# EAGLE board Finalized Dashboard (EAGLE 7.6.0)
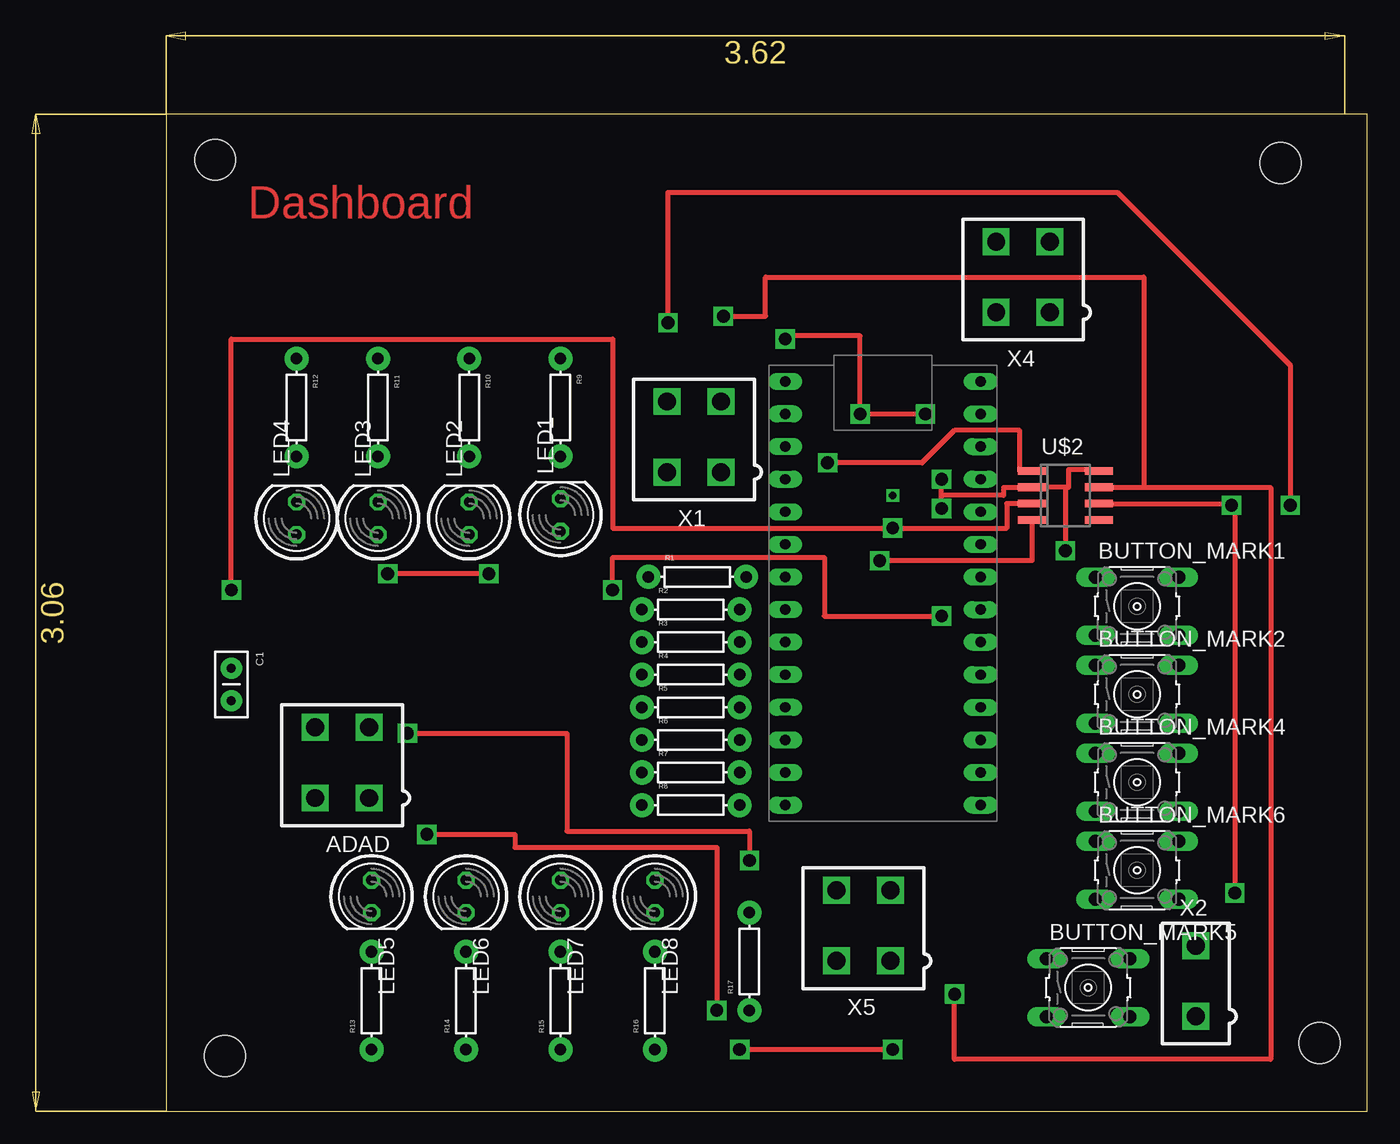
[diagram p0: board, top side]
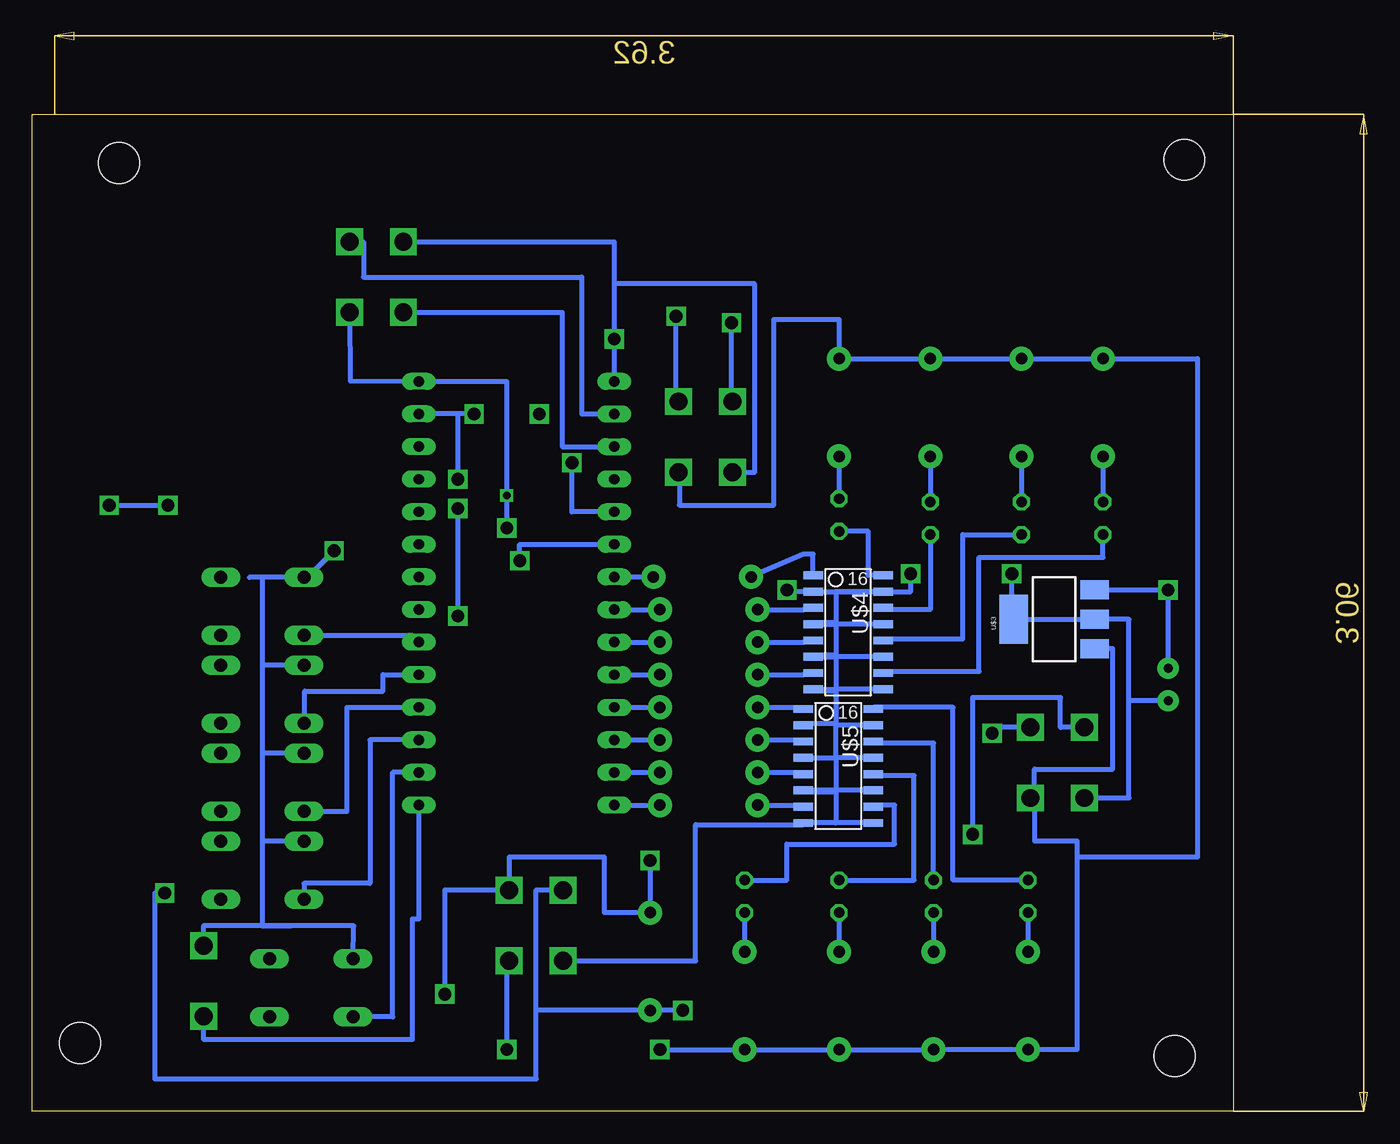
[diagram p1: board, bottom side, seen from below]

Size 93.65 x 77.71 mm. Coordinates in mm from the lower left corner, seen from the top.
Outline: 0,0 93.65,0 93.65,77.71 0,77.71 0,0
Copper layers (1*16): Top 0.035mm / dielectric 1.5mm / Bottom 0.035mm
Design rules "default": minimum track width 10mil, minimum drill 24mil, track to track 8mil, track to pad 8mil, pad to pad 8mil, via to via 8mil, smd to smd 8mil, copper to edge 40mil, drill to drill 8mil, minimum pad ring 10mil, minimum via ring 8mil, stop-mask expansion 4mil, vias tented up to drill 0mil, thermal gap 10mil
Holes 3.2 mm at 3.81,74.17 86.87,73.91 4.57,4.32 89.92,5.33

## Footprints (pad centres in the part's own frame; a part is rotated, then mirrored left to right if it is on the bottom)
MINIFIT_5566-4 = drill 1.4 square: 1 2.1,-2.75; 2 -2.1,-2.75; 3 2.1,2.75; 4 -2.1,2.75
B3F-10XX = drill 1.016 long: 1 -3.251,2.261; 2 3.251,2.261; 3 -3.251,-2.261; 4 3.251,-2.261
CAP-PTH-SMALLEZ = drill 0.7 pad 1.651: 1 0,0; 2 2.54,0
LED-5MM = drill 0.813 octagon: A -1.27,0; K 1.27,0
AXIAL-0.3 = drill 0.9 pad 1.88: P$1 -3.81,0; P$2 3.81,0
TEENSY_3.2_SIMPLE = drill 0.8 long: 3.3V 16.51,29.21; A0 16.51,3.81; A1 16.51,6.35; A2 16.51,8.89; A3 16.51,11.43; A4 16.51,13.97; A5 16.51,16.51; A6 16.51,19.05; A7 16.51,21.59; A8 16.51,24.13; A9 16.51,26.67; AGND 16.51,31.75; D0(RX1) 1.27,31.75; D1(TX1) 1.27,29.21; D2 1.27,26.67; D3(CANTX) 1.27,24.13; D4(CANRX) 1.27,21.59; D5 1.27,19.05; D6 1.27,16.51; D7(RX3) 1.27,13.97; D8(TX3) 1.27,11.43; D9(RX2) 1.27,8.89; D10(TX2) 1.27,6.35; D11 1.27,3.81; D12 1.27,1.27; D13 16.51,1.27; GND 1.27,34.29; VIN 16.51,34.29
SOIC-08 = smd 0.6 x 2.2: 1 -1.905,-2.6; 2 -0.635,-2.6; 3 0.635,-2.6; 4 1.905,-2.6; 5 1.905,2.6; 6 0.635,2.6; 7 -0.635,2.6; 8 -1.905,2.6
SOT223 = smd 1.5 x 2.235: 1 -2.3,-3.15; 2 0,-3.15; 3 2.3,-3.15 | smd 3.8 x 2.2: 4 0,3.15
SOIC-16 = smd 0.61 x 1.524: 1 -4.445,-2.794; 2 -3.175,-2.794; 3 -1.905,-2.794; 4 -0.635,-2.794; 5 0.635,-2.794; 6 1.905,-2.794; 7 3.175,-2.794; 8 4.445,-2.794; 9 4.445,2.667; 10 3.175,2.667; 11 1.905,2.667; 12 0.635,2.667; 13 -0.635,2.667; 14 -1.905,2.667; 15 -3.175,2.667; 16 -4.445,2.667
MINIFIT_5566-2 = drill 1.4 square: 1 0,-2.75; 2 0,2.75

## Placement (x,y rotation side)
ADAD  MINIFIT_5566-4  [MINIFIT_5566-4]  13.72,27.18 0 top
BUTTON_MARK1  [B3F-10XX]  75.69,39.37 0 top
BUTTON_MARK2  [B3F-10XX]  75.69,32.51 0 top
BUTTON_MARK4  [B3F-10XX]  75.69,25.65 0 top
BUTTON_MARK5  [B3F-10XX]  71.88,9.65 0 top
BUTTON_MARK6  [B3F-10XX]  75.69,18.8 0 top
C1  [CAP-PTH-SMALLEZ]  5.08,34.54 270 top
LED1  [LED-5MM]  30.73,46.48 90 top
LED2  [LED-5MM]  23.62,46.23 90 top
LED3  [LED-5MM]  16.51,46.23 90 top
LED4  [LED-5MM]  10.16,46.23 90 top
LED5  [LED-5MM]  16,16.76 270 top
LED6  [LED-5MM]  23.37,16.76 270 top
LED7  [LED-5MM]  30.73,16.76 270 top
LED8  [LED-5MM]  38.1,16.76 270 top
R1  [AXIAL-0.3]  41.4,41.66 0 top
R2  [AXIAL-0.3]  40.89,39.12 0 top
R3  [AXIAL-0.3]  40.89,36.58 0 top
R4  [AXIAL-0.3]  40.89,34.04 0 top
R5  [AXIAL-0.3]  40.89,31.5 0 top
R6  [AXIAL-0.3]  40.89,28.96 0 top
R7  [AXIAL-0.3]  40.89,26.42 0 top
R8  [AXIAL-0.3]  40.89,23.88 0 top
R9  [AXIAL-0.3]  30.73,54.86 270 top
R10  [AXIAL-0.3]  23.62,54.86 270 top
R11  [AXIAL-0.3]  16.51,54.86 270 top
R12  [AXIAL-0.3]  10.16,54.86 270 top
R13  [AXIAL-0.3]  16,8.64 90 top
R14  [AXIAL-0.3]  23.37,8.64 90 top
R15  [AXIAL-0.3]  30.73,8.64 90 top
R16  [AXIAL-0.3]  38.1,8.64 90 top
R17  [AXIAL-0.3]  45.47,11.68 90 top
U$1  TEENSY_3.2_SIMPLE  [TEENSY_3.2_SIMPLE]  46.99,22.61 0 top
U$2  MCP2551  [SOIC-08]  70.1,48.01 270 top
U$3  [SOT223]  13.97,38.35 90 bottom
U$4  TLP291-4  [SOIC-16]  29.97,37.34 270 bottom
U$5  TLP291-4  [SOIC-16]  30.73,26.92 270 bottom
X1  MINIFIT_5566-4  [MINIFIT_5566-4]  41.15,52.58 0 top
X2  MINIFIT_5566-2  [MINIFIT_5566-2]  80.26,10.16 0 top
X4  MINIFIT_5566-4  [MINIFIT_5566-4]  66.8,65.02 0 top
X5  MINIFIT_5566-4  [MINIFIT_5566-4]  54.36,14.48 0 top

## Library data of the parts
ADAD X1 X4 X5 = HyTechDevices; OC_FARNELL: unknown; OC_NEWARK: unknown
BUTTON_MARK1 BUTTON_MARK2 BUTTON_MARK4-BUTTON_MARK6 = HyTechDevices; MPN: B3F-1000; OC_FARNELL: 176432; OC_NEWARK: 36M3542
C1 LED1-LED8 R1-R17 U$1-U$5 = HyTechDevices
X2 = HyTechDevices; OC_FARNELL: 1822072; OC_NEWARK: unknown

## Nets
5V: C1.1 U$1.VIN U$2.3 U$3.3 X4.1
12V: ADAD.1 R9.P$1 R10.P$1 R11.P$1 R12.P$1 R13.P$1 R14.P$1 R15.P$1 R16.P$1 U$3.1 X1.1 X5.1
CAN-H: ADAD.3 R17.P$2 U$2.7 X1.3 X5.3
CAN-L: ADAD.4 R17.P$1 U$2.6 X1.4 X5.4
GND: ADAD.2 BUTTON_MARK1.1 BUTTON_MARK2.1 BUTTON_MARK4.1 BUTTON_MARK5.1 BUTTON_MARK6.1 C1.2 U$1.AGND U$1.GND U$2.2 U$2.8 U$3.2 U$3.4 U$4.2 U$4.4 U$4.6 U$4.8 U$4.9 U$4.11 U$4.13 U$4.15 U$5.2 U$5.4 U$5.6 U$5.8 U$5.9 U$5.11 U$5.13 U$5.15 X1.2 X2.2 X4.4 X5.2
N$2: U$1.D1(TX1) X4.2
N$5: R1.P$1 U$4.1
N$7: R2.P$1 U$4.3
N$8: R3.P$1 U$4.5
N$9: U$1.D3(CANTX) U$2.1
N$10: U$1.D4(CANRX) U$2.4
N$11: R4.P$1 U$4.7
N$12: R5.P$1 U$5.1
N$13: U$1.D0(RX1) X4.3
N$14: R6.P$1 U$5.3
N$15: R7.P$1 U$5.5
N$16: R8.P$1 U$5.7
N$17: R1.P$2 U$1.D5
N$19: R3.P$2 U$1.D7(RX3)
N$20: R4.P$2 U$1.D8(TX3)
N$21: R5.P$2 U$1.D9(RX2)
N$22: R6.P$2 U$1.D10(TX2)
N$23: R7.P$2 U$1.D11
N$24: R8.P$2 U$1.D12
N$25: LED1.A U$4.16
N$26: LED2.A U$4.14
N$27: LED3.A U$4.12
N$28: LED4.A U$4.10
N$29: LED5.A U$5.16
N$30: LED6.A U$5.14
N$31: LED7.A U$5.12
N$32: LED8.A U$5.10
N$33: LED1.K R9.P$2
N$34: LED2.K R10.P$2
N$35: LED3.K R11.P$2
N$36: LED4.K R12.P$2
N$37: LED5.K R13.P$2
N$38: LED6.K R14.P$2
N$39: LED7.K R15.P$2
N$40: LED8.K R16.P$2
N$41: U$1.D13 X2.1
N$42: BUTTON_MARK1.3 U$1.A4
N$43: BUTTON_MARK2.3 U$1.A3
N$44: BUTTON_MARK4.3 U$1.A2
N$45: BUTTON_MARK6.3 U$1.A1
N$46: BUTTON_MARK5.3 U$1.A0
N$47: R2.P$2 U$1.D6

## Tracks (layer width: path | path; a pad name or v marks a point on that pad's centre or on a via)
5V  (via drill 0.6, 1)
  Top 0.406: U$2.3 65.53,47.37 65.53,45.47 v56.64,45.47 34.8,45.47 34.8,60.2 5.08,60.2 v5.08,40.64
  Bottom 0.406: U$3.3 7.87,40.65 v5.08,40.64 C1.1 | U$1.VIN 63.75,56.9 | U$1.VIN 68.83,56.94 X4.1 | U$1.VIN 56.64,56.9 v56.64,48.01 v56.64,45.47
12V  (via drill 1)
  Top 0.406: v56.64,4.83 v44.7,4.83
  Bottom 0.406: ADAD.1 15.49,24.43 | 15.49,24.43 15.49,21.08 12.19,21.08 12.19,19.81 | 12.19,19.81 12.19,4.83 R13.P$1 R14.P$1 R15.P$1 R16.P$1 v44.7,4.83 | 15.49,24.43 15.49,26.67 9.4,26.67 9.4,36.07 10.82,36.07 U$3.1 | X1.1 43.18,49.83 43.18,47.24 35.81,47.24 35.81,61.72 30.73,61.72 R9.P$1 R10.P$1 R11.P$1 R12.P$1 2.79,58.67 2.79,19.81 12.19,19.81 | X5.1 56.64,11.73 v56.64,4.83
CAN-H  (via drill 1)
  Top 0.406: U$2.7 76.2,48.64 | 76.2,48.64 86.11,48.64 86.11,4.06 61.47,4.06 v61.47,9.14 | v43.43,61.98 46.74,61.98 46.74,65.02 76.2,65.02 76.2,48.64 | v18.8,29.46 31.24,29.46 31.24,21.84 45.47,21.84 v45.47,19.56
  Bottom 0.406: v61.47,9.14 61.47,17.27 56.46,17.27 X5.3 56.46,19.81 49.02,19.81 49.02,15.49 R17.P$2 v45.47,19.56 | X1.3 43.43,55.33 v43.43,61.98 | ADAD.3 18.8,29.93 v18.8,29.46
CAN-L  (via drill 1)
  Top 0.406: U$2.6 83.31,47.37 83.31,47.24 | 83.31,47.24 v83.31,17.02 | v39.12,61.47 39.12,71.63 74.17,71.63 87.63,58.17 v87.63,47.24 | v83.06,47.24 83.31,47.24 | v20.32,21.59 27.18,21.59 27.18,20.57 42.93,20.57 v42.93,7.87
  Bottom 0.406: v83.31,17.02 84.07,17.02 84.07,2.54 54.36,2.54 54.36,7.87 | 54.36,7.87 54.36,17.27 52.26,17.27 X5.4 | X1.4 39.12,55.33 v39.12,61.47 | v87.63,47.24 v83.06,47.24 | 54.36,7.87 R17.P$1 v42.93,7.87 | ADAD.4 13.46,29.93 13.46,32.26 20.32,32.26 v20.32,21.59
GND  (via drill 1)
  Top 0.406: 70.1,48.64 70.36,48.64 70.36,50.04 72.7,50.04 U$2.8 | 70.1,48.64 v70.1,43.69 | 60.45,48.01 65.28,48.01 65.28,48.64 U$2.2 70.1,48.64 | 60.45,48.01 v60.45,49.28 | v59.18,54.36 v54.1,54.36 54.1,60.45 48.26,60.45 v48.26,60.2 | v25.15,41.91 v17.27,41.91 | v34.8,40.64 34.8,43.18 51.31,43.18 51.31,38.61 v60.45,38.61 | v60.45,46.99 60.45,48.01
  Bottom 0.406: U$4.2 30.99,40.51 | 30.99,40.51 30.99,38.1 32.77,38.1 U$4.4 30.99,37.97 | 30.99,37.97 30.99,35.56 | 30.99,35.56 32.77,35.56 U$4.6 30.99,35.43 | 30.99,35.43 30.99,32.89 | 30.99,32.89 30.99,32.77 | 30.99,32.77 32.77,32.77 U$4.8 30.99,32.89 | 30.99,32.77 30.99,30.23 | 30.99,30.23 33.53,30.23 U$5.2 | 30.99,27.56 30.99,30.1 | 30.99,30.1 30.99,30.23 | U$5.4 30.99,27.56 | 30.99,27.56 30.99,24.89 | 30.99,24.89 33.53,24.89 U$5.6 U$5.11 | 30.99,24.89 30.99,22.48 | 33.78,22.61 33.53,22.61 U$5.8 | U$5.9 30.99,22.48 | U$5.13 30.99,27.56 | U$4.15 30.99,40.51 | U$4.13 30.99,37.97 | U$4.11 30.99,35.43 | 30.99,35.43 30.99,35.56 | U$4.9 30.99,32.89 | 30.99,22.48 U$5.8 | U$5.15 30.99,30.1 | BUTTON_MARK5.1 68.58,14.45 75.7,14.47 | 75.7,14.47 73.41,14.48 80.26,14.48 X2.2 | BUTTON_MARK6.1 75.7,21.06 | 75.7,21.06 75.7,14.47 | BUTTON_MARK4.1 75.7,27.92 | 75.7,27.92 75.7,21.06 | BUTTON_MARK2.1 75.7,34.77 | 75.7,34.77 75.7,27.92 | 75.7,41.63 BUTTON_MARK1.1 72.16,41.63 v70.1,43.69 70.16,43.69 | 75.7,41.63 75.7,34.77 | 75.7,41.63 76.71,41.63 | v60.45,49.28 60.45,54.36 | v59.18,54.36 60.45,54.36 | U$5.8 33.53,22.35 41.91,22.35 41.91,11.73 X5.2 | U$4.2 25.15,40.51 v25.15,41.91 | 17.12,41.91 v17.27,41.91 17.27,38.35 U$3.4 U$3.2 8.13,38.35 8.13,32 | U$4.2 34.29,40.51 v34.8,40.64 | v60.45,38.61 v60.45,46.99 | X1.2 39.05,49.78 37.34,49.78 37.34,64.52 48.26,64.52 | ADAD.2 8.13,24.43 8.13,32 | C1.2 8.13,32 | X4.4 48.26,67.77 48.26,64.52 | 60.45,54.36 U$1.AGND | U$1.GND v48.26,60.2 48.26,64.52
N$2
  Bottom 0.406: X4.2 52.32,62.27 52.32,51.82 U$1.D1(TX1)
N$5
  Bottom 0.406: U$4.1 32.77,43.43 33.53,43.43 R1.P$1
N$7
  Bottom 0.406: R2.P$1 33.53,39.12 U$4.3
N$8
  Bottom 0.406: R3.P$1 33.53,36.58 U$4.5
N$9  (via drill 1)
  Top 0.406: U$2.1 66.55,49.91 66.55,53.09 61.47,53.09 58.93,50.55 v51.56,50.55
  Bottom 0.406: U$1.D3(CANTX) 51.56,46.74 v51.56,50.55
N$10  (via drill 1)
  Top 0.406: U$2.4 67.5,42.93 v55.63,42.93
  Bottom 0.406: v55.63,42.93 55.63,44.2 U$1.D4(CANRX)
N$11
  Bottom 0.406: R4.P$1 33.53,34.04 U$4.7
N$12
  Bottom 0.406: R5.P$1 33.53,31.5 U$5.1
N$13
  Bottom 0.406: X4.3 67.82,67.77 67.82,65.02 50.8,65.02 50.8,54.36 U$1.D0(RX1)
N$14
  Bottom 0.406: R6.P$1 33.53,28.96 U$5.3
N$15
  Bottom 0.406: R7.P$1 33.53,26.42 U$5.5
N$16
  Bottom 0.406: R8.P$1 33.53,23.88 U$5.7
N$17
  Bottom 0.406: U$1.D5 R1.P$2
N$19
  Bottom 0.406: U$1.D7(RX3) R3.P$2
N$20
  Bottom 0.406: U$1.D8(TX3) R4.P$2
N$21
  Bottom 0.406: U$1.D9(RX2) R5.P$2
N$22
  Bottom 0.406: U$1.D10(TX2) R6.P$2
N$23
  Bottom 0.406: U$1.D11 R7.P$2
N$24
  Bottom 0.406: U$1.D12 R8.P$2
N$25
  Bottom 0.406: U$4.16 28.45,41.78 28.45,45.21 LED1.A
N$26
  Bottom 0.406: LED2.A 23.62,39.12 27.3,39.12 U$4.14
N$27
  Bottom 0.406: U$4.12 27.3,36.83 21.08,36.83 21.08,44.96 LED3.A
N$28
  Bottom 0.406: U$4.10 27.3,34.29 19.81,34.29 19.81,43.18 10.16,43.18 LED4.A
N$29
  Bottom 0.406: LED5.A 21.84,18.03 21.84,31.5 28.07,31.5 U$5.16
N$30
  Bottom 0.406: LED6.A 23.37,28.7 28.07,28.7 U$5.14
N$31
  Bottom 0.406: LED7.A 24.89,18.03 24.89,26.16 28.07,26.16 U$5.12
N$32
  Bottom 0.406: LED8.A 34.8,18.03 34.8,20.83 26.42,20.83 26.42,23.88 28.07,23.88 U$5.10
N$33
  Bottom 0.406: R9.P$2 LED1.K
N$34
  Bottom 0.406: R10.P$2 LED2.K
N$35
  Bottom 0.406: R11.P$2 LED3.K
N$36
  Bottom 0.406: R12.P$2 LED4.K
N$37
  Bottom 0.406: LED5.K R13.P$2
N$38
  Bottom 0.406: LED6.K R14.P$2
N$39
  Bottom 0.406: LED7.K R15.P$2
N$40
  Bottom 0.406: LED8.K R16.P$2
N$41
  Bottom 0.406: U$1.D13 63.5,14.99 64.01,14.99 64.01,5.59 80.26,5.59 X2.1
N$42
  Bottom 0.406: 63.5,36.6 U$1.A4 64.03,37.11 BUTTON_MARK1.3
N$43
  Bottom 0.406: BUTTON_MARK2.3 72.39,30.25 72.39,32.77 66.29,32.77 66.29,34.04 U$1.A3
N$44
  Bottom 0.406: BUTTON_MARK4.3 69.09,23.39 69.09,31.5 U$1.A2
N$45
  Bottom 0.406: U$1.A1 67.31,28.96 67.31,17.78 72.44,17.78 BUTTON_MARK6.3
N$46
  Bottom 0.406: U$1.A0 65.53,26.42 65.53,7.37 68.63,7.37 BUTTON_MARK5.3
N$47
  Bottom 0.406: U$1.D6 R2.P$2

## Text on the board
Top: Dashboard